# Altium PCB pcb.PcbDoc
Units mm, origin at the board's own origin, x right, y up, seen from the top; angles counter-clockwise.
Board outline 100 x 50 mm, 2 copper layers (Top Layer, Bottom Layer); 36 components, 19 nets, 91 pads, 8 vias.
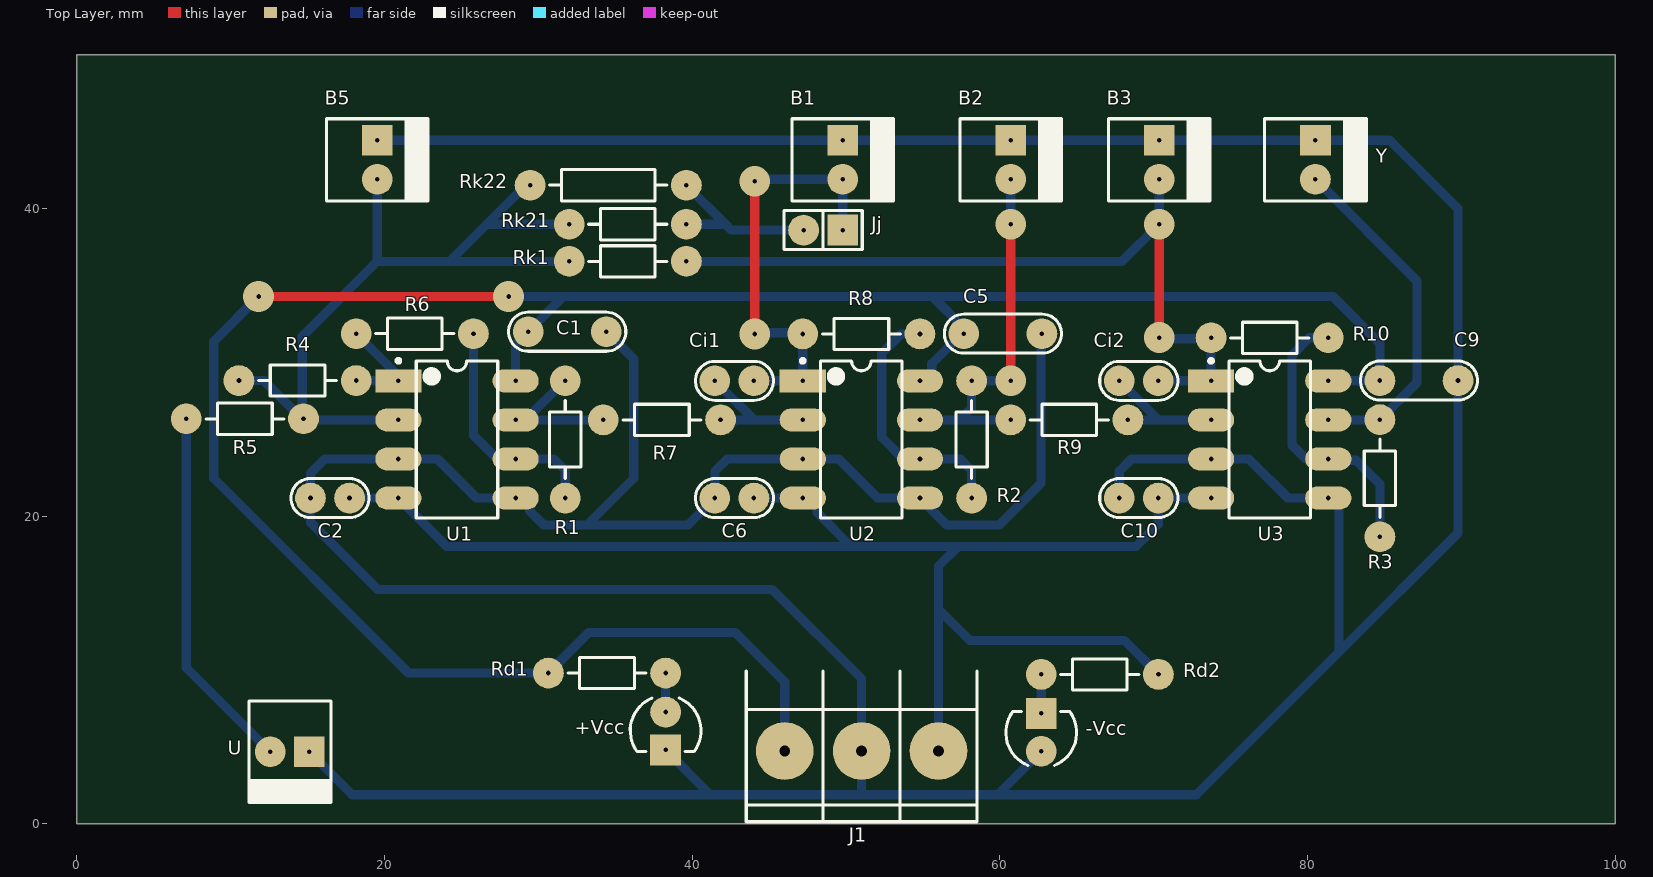
[diagram p0: Top Layer view]
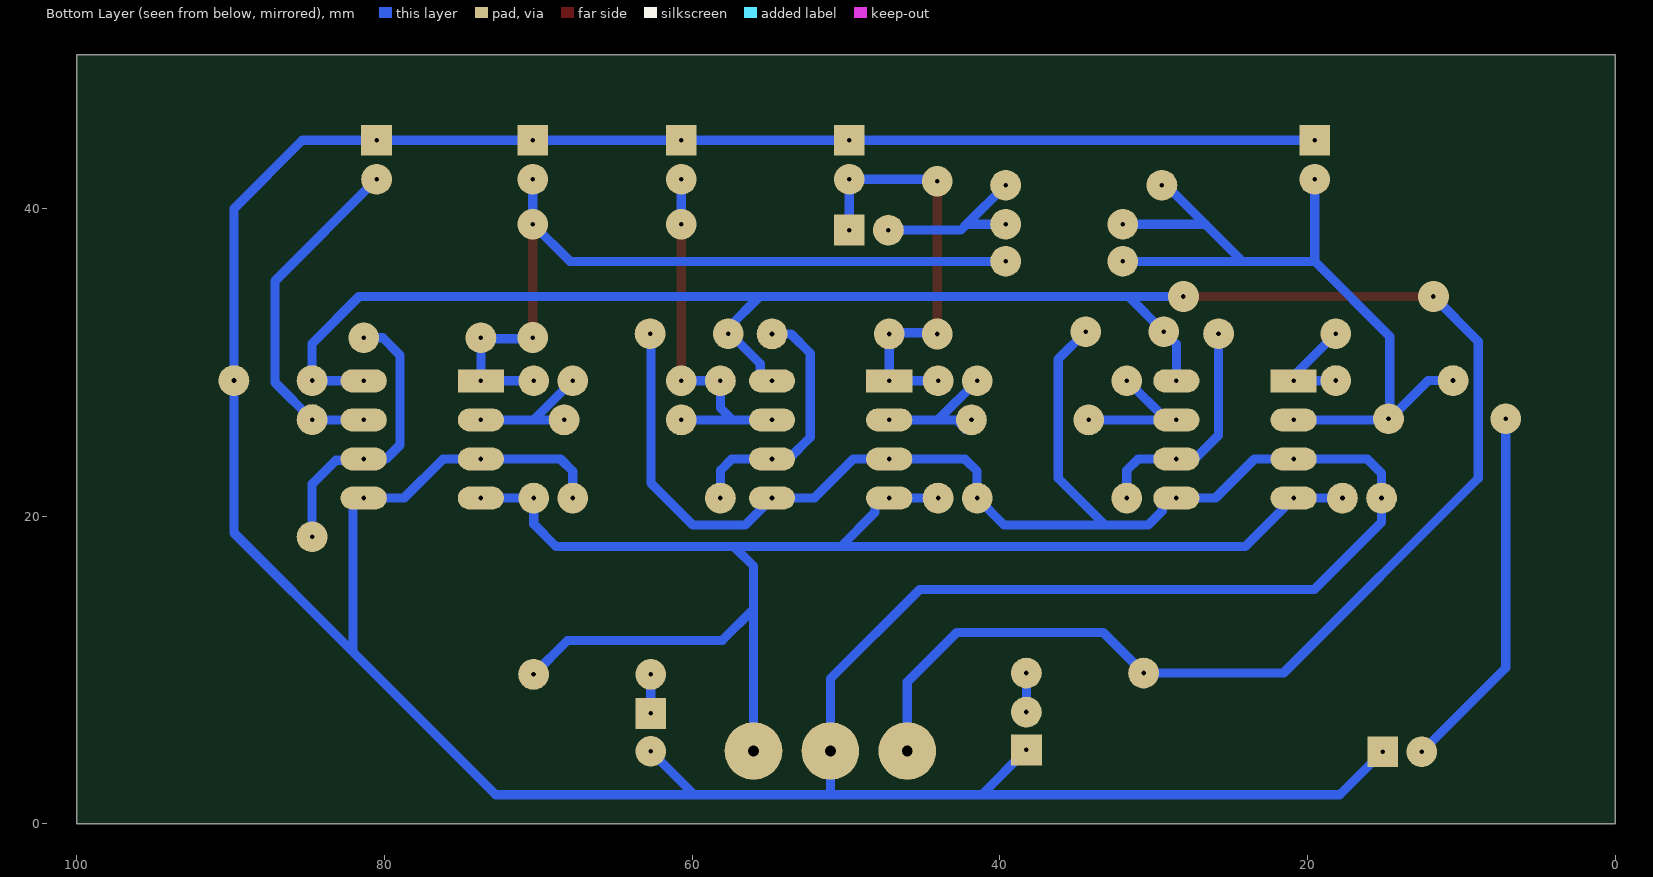
[diagram p1: Bottom Layer view, seen from below]
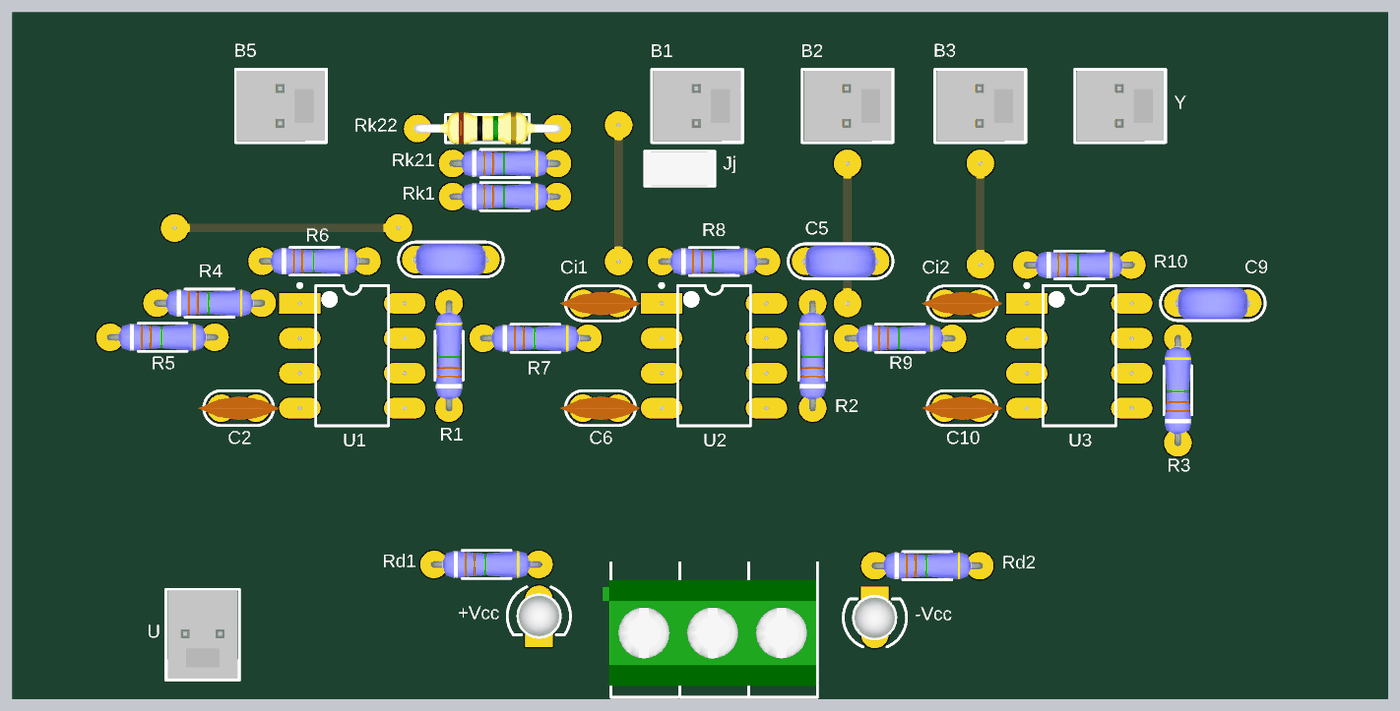
[diagram p2: 3D render of the assembled board from above, using the file's embedded part models]

## Layer stack, top to bottom
Top Solder: solder mask 0.0102, Solder Resist, Dk 3.5
Top Layer: signal copper 0.0356
Dielectric 1: dielectric 0.32, FR-4, Dk 4.8
Bottom Layer: signal copper 0.0356
Bottom Solder: solder mask 0.0102, Solder Resist, Dk 3.5

## Board outline
0,0 100,0 100,50 0,50

## Design rules (kind name [scope] priority, off if disabled: settings)
Clearance [All] p1: gap=0.3 ignorepadtopadclearanceinfootprint=FALSE
PolygonConnect [All] p1: connectstyle=Relief reliefconductorwidth=0.254 reliefentries=4 polygonreliefangle="90 Angle" airgapwidth=0.254
RoutingVias [All] p1: holewidth=0.3 width=2 viastyle="Through Hole" minholewidth=0.3 minwidth=1.5 maxholewidth=0.6 maxwidth=2
SolderMaskExpansion [All] p1: expansion=0.102 istentingtop=FALSE
Width [All] p1: maxlimit=0.9 minlimit=0.6 preferedwidth=0.6
30 further rules are at their usual default settings.

## Components (designator, comment, footprint, x,y, rotation, side; value= is the part's Value field where it differs from the comment)
+Vcc "LED" LED3 38.273,6.061 r270 top
-Vcc "LED" LED3 62.692,5.943 r90 top
B1 "MOLEX2" MOLEX2 49.784,44.45 r270 top
B2 "MOLEX2" MOLEX2 60.706,44.45 r270 top
B3 "MOLEX2" MOLEX2 70.358,44.45 r270 top
B5 "MOLEX2" MOLEX2 19.531,44.45 r270 top
C1 "100n" CAP200 31.877,32.004 r0 top
C2 "100n" CAP100 16.456,21.19 r180 top
C5 "100n" CAP200 60.198,31.877 r0 top
C6 "100n" CAP100 42.745,21.19 r180 top
C9 "100n" CAP200 87.249,28.829 r0 top
C10 "100n" CAP100 69.034,21.19 r180 top
Ci1 "1u" CAP100 42.745,28.81 r180 top
Ci2 "1u" CAP100 69.034,28.81 r180 top
J1 "BORNERA 3" BORNERA3 51.016,4.746 r90 top
Jj "JUMPER" JUMPER2 48.514,38.608 r180 top
R1 "10k" RES300 31.75,21.19 r90 top
R2 "10k" RES300 58.166,21.19 r90 top
R3 "10k" RES300 84.709,18.669 r90 top
R4 "10k" RES300 10.536,28.829 r0 top
R5 "10k" RES300 7.112,26.343 r0 top
R6 "10k" RES300 18.161,31.877 r0 top
R7 "100k" RES300 34.222,26.27 r0 top
R8 "10k" RES300 47.19,31.858 r0 top
R9 "47k" RES300 60.706,26.27 r0 top
R10 "10k" RES300 73.733,31.604 r0 top
Rd1 "560" RES300 30.653,9.816 r0 top
Rd2 "560" RES300 62.692,9.724 r0 top
Rk1 "10k" RES300 32.004,36.576 r0 top
Rk21 "10k/1.33" RES300 32.004,38.989 r0 top
Rk22 "15k" RES400 29.464,41.529 r0 top
U "MOLEX2" MOLEX2 15.113,4.699 r180 top
U1 "TL082CP" P0008A 24.711,25 r0 top
U2 "TL082CP" P0008A 51,25 r0 top
U3 "TL082CP" P0008A 77.543,25 r0 top
Y "MOLEX2" MOLEX2 80.518,44.45 r270 top

## Footprints (in the part's own frame and the unit in brackets; to place one, negate y for a bottom-side part, rotate by r counter-clockwise, add the part's x,y. Pads: shape width x height; smd on the part's side, far side on the other; paste and mask are expansions set on the pad)
BORNERA3 [mm] "Bornera con Tornillos 5mm separación"
  round 3.75 hole 0.7: 1(0,5) 2(0,0) 3(0,-5)
  silkscreen extent -4.6,-7.5 5.2,7.5, body extent -3.76,-7.39 3.94,8.11, height 10.05
CAP100 [mm]
  round 2 hole 0.3: 1(-1.27,0) 2(1.27,0)
  silkscreen extent -2.54,-1.27 2.54,1.27, body extent -2.92,-0.84 2.92,0.86, height 6.12
CAP200 [mm]
  round 2 hole 0.3: 1(-2.54,0) 2(2.54,0)
  silkscreen extent -3.81,-1.27 3.81,1.27, body extent -2.79,-1.17 2.79,1.12, height 6.24
JUMPER2 [mm]
  rect 2x2 hole 0.3: 1(-1.27,0)
  round 2 hole 0.3: 2(1.27,0)
  silkscreen extent -2.54,-1.27 2.54,1.27, body extent -2.46,-1.27 2.54,1.27, height 9.5
LED3 [mm]
  round 2 hole 0.3: 1(-1.219,0)
  rect 2x2 hole 0.3: 2(1.245,0)
  silkscreen extent -2.13,-2.3 1.36,2.3, body extent -1.65,-1.63 1.65,1.66, height 0.49
MOLEX2 [mm]
  rect 2x2 hole 0.3: 1(0,0)
  round 2 hole 0.3: 2(2.54,0)
  silkscreen extent -1.4,-3.3 3.94,3.3, body extent -1.27,-3.18 3.81,3.18, height 10.74
P0008A [mm] "DIP, 8-Leads, Body 10.15x6.6mm, Pitch 2.54mm"
  rect 3x1.5 hole 0.3: 1(-3.81,3.81)
  oval 3x1.5 hole 0.3: 2(-3.81,1.27) 3(-3.81,-1.27) 4(-3.81,-3.81) 5(3.81,-3.81) 6(3.81,-1.27) 7(3.81,1.27) 8(3.81,3.81)
  silkscreen extent -3.93,-5.1 2.65,5.23, body extent -3.95,-5.07 3.95,5.07, height 5.08
RES300 [mm]
  round 2 hole 0.3: 1(0,0) 2(7.62,0)
  silkscreen extent 1.27,-1.02 6.35,1.02, body extent -0.25,-0.97 7.87,0.97, height 2.01
RES400 [mm]
  round 2 hole 0.3: 1(0,0) 2(10.16,0)
  silkscreen extent 1.27,-1.02 8.89,1.02, body extent -0.3,-1.14 10.46,1.17, height 2.43

## Part data
C1 C2 C5 C6 C9 C10 Ci1 Ci2: library part CAP
R1 R2 R3 R4 R5 R6 R7 R8 R9 R10 Rd1 Rd2 Rk1 Rk21 Rk22: library part RES
U1 U2 U3: library part CMP-0055-00158-5, "JFET-Input Operational Amplifier, 7 to 36 V, 0 to 70 degC, 8-pin DIP (P8), Pb-Free (RoHS)", Manufacturer="Texas Instruments", Rating=Catalog, Total Supply Voltage(Max)(+5V is 5, +/-5V is 10)=36, Total Supply Voltage(Min)(+5V is 5, +/-5V is 10)=7, CMRR(Min)(dB)=70, Code_JEDEC=MS-001, ComponentLink1Description="Manufacturer URL", ComponentLink1URL=http://www.ti.com/, ComponentLink2Description=Datasheet, ComponentLink2URL=http://www.ti.com/lit/ds/symlink/tl082.pdf, ComponentLink3Description="Package Specification", ComponentLink3URL=http://www.ti.com/litv/pdf/mpdi001b, DatasheetVersion=SLOS081G, Eco-Plan="Pb-Free (RoHS)", GBW(Typ)(MHz)=3, IIB(Max)(pA)=400, Iq per channel(Max)(mA)=2.8, Mounting Technology="Through Hole", Number of Channels=2, Offset Drift(Typ)(uV/C)=18, PackageDescription="8-Pin Plastic In-Line, Body 9.59 x 6.35 mm, Pitch 2.54 mm", PackageReference=P0008A, PackageVersion="4040082/E, 04/2010", PartNumber=TL082CP, Slew Rate(Typ)(V/us)=13, Sub Family="General Purpose Amplifier, High Supply Voltage Amplifier (>=30V)", Vio (25C)(Max)(mV)=15, Vn at 1kHz(Typ)(nV/rtHz)=18

## Via types
v1: diameter 2, hole 0.3, Top Layer to Bottom Layer, 8 vias

## Nets (pads, with @x,y where several pads share a name; then routed paths per layer and width w, separated by ;. In a path a pad name is that pad's centre, name@x,y a point inside that pad or via, vN(x,y) a via of type N, cw(c..) or ccw(c..) an arc to the next point about the centre after c; other vN are vias at no path point)
+12V: C1.1 C5.1 C9.1 J1.1 Rd1.1 U1.8 U2.8 U3.8 | length 156.9
  Top Layer w0.6: v1(11.811,34.29) v1(28.067,34.29)
  Bottom Layer w0.6: v1(11.811,34.29) 8.89,31.369 8.89,22.479 21.553,9.816 Rd1.1 33.283,12.446 42.799,12.446 46.016,9.229 J1.1 J1.1@45.597,5.165 ; v1@28.194,34.29 31.623,34.29 ; U1.8 28.521,31.188 C1.1 ; C1.1@29.337,31.625 C1.1 ; U2.8 55.163,28.81 55.579,29.226 55.579,29.925 57.658,32.004 57.658,32.258 55.626,34.29 ; U3.8 81.362,28.82 84.065,28.82 C9.1@84.074,28.829 ; C9.1 84.709,31.242 81.661,34.29 55.626,34.29 ; C1.1 31.623,34.29 ; 31.623,34.29 55.626,34.29
-12V: C2.1 C6.1 C10.1 J1.3 Rd2.2 U1.4 U2.4 U3.4 | length 94.8
  Bottom Layer w0.6: C2.1@18.615,21.19 U1.4 24.057,18.034 50.346,18.034 ; C6.1@44.904,21.19 47.696,21.19 48.112,20.774 48.112,20.268 50.346,18.034 ; J1.3 56.016,13.961 ; 56.016,13.97 56.016,13.961 ; Rd2.2 68.098,11.938 58.039,11.938 56.016,13.961 ; U3.4@72.844,21.19 C10.1 70.304,19.504 68.834,18.034 57.277,18.034 ; 50.346,18.034 57.277,18.034 ; 56.016,13.961 56.007,13.97 56.007,16.764 57.277,18.034
B1: B1.2 Ci1.1 Jj.1 R8.1 U2.1 | length 26.6
  Top Layer w0.6: v1(44.069,31.858) v1(44.069,41.783)
  Bottom Layer w0.6: v1@44.069,32.004 v1@44.142,31.931 ; v1(44.069,41.783) 44.196,41.91 B1.2 Jj.1 ; Ci1.1@44.904,28.81 U2.1 R8.1 47.117,31.931 v1@45.031,31.931
B2: B2.2 R2.2 R9.1 U2.7 | length 24.1
  Top Layer w0.6: v1@60.706,29.337 v1(60.706,38.989)
  Bottom Layer w0.6: U2.7 57.385,26.27 ; v1@60.579,39.116 v1(60.706,38.989) B2.2 ; R9.1 57.385,26.27 ; v1(60.706,28.81) R2.2 58.166,27.051 57.385,26.27
B3: B3.2 Ci2.1 R10.1 Rk1.2 U3.1 | length 49.9
  Top Layer w0.6: v1(70.358,31.623) v1(70.358,38.989)
  Bottom Layer w0.6: Rk1.2 67.945,36.576 v1(70.358,38.989) B3.2 ; Ci2.1 U3.1@72.844,28.81 ; v1(70.358,31.623) 70.431,31.55 R10.1@72.79,31.55 ; R10.1@73.679,31.55 R10.1 U3.1
B4: R3.2 U3.7 Y.2 | length 22.2
  Bottom Layer w0.6: Y.2 87.122,35.306 87.122,28.702 R3.2 ; U3.7 R3.2@84.182,26.27
B5: B5.2 R4.1 R5.2 Rk1.1 Rk21.1 Rk22.1 U1.2 | length 53.2
  Bottom Layer w0.6: R4.1 12.156,28.829 14.65,26.334 14.65,31.695 19.531,36.576 ; R5.2@14.815,26.27 U1.2 ; B5.2 19.531,36.576 ; 24.434,36.78 26.643,38.989 ; Rk22.1@29.056,41.402 26.643,38.989 ; Rk1.1 24.434,36.576 19.531,36.576 ; Rk21.1 26.643,38.989
GND: +Vcc.2 -Vcc.1 B1.1 B2.1 B3.1 B5.1 C1.2 C2.2 C5.2 C6.2 C9.2 C10.2 J1.2 U1.3 U1.5 U2.3 U2.5 U3.3 U3.5 U.1 Y.1 | length 342.2
  Bottom Layer w0.6: U.1 17.907,1.905 41.184,1.905 ; B5.1 B1.1 60.198,44.45 B3.1 Y.1 85.344,44.45 89.789,40.005 C9.2 89.789,18.923 82.042,11.176 ; C1.2 36.195,30.226 36.195,22.479 33.147,19.431 ; +Vcc.2 41.184,1.905 ; C5.2@62.684,32.004 62.684,22.171 59.944,19.431 56.569,19.431 U2.5 52.07,21.19 49.53,23.73 U2.3 42.272,23.73 41.475,22.933 C6.2 39.716,19.431 33.147,19.431 ; -Vcc.1 59.873,1.905 ; C10.2 67.764,22.933 68.561,23.73 U3.3 76.193,23.73 78.733,21.19 U3.5 81.626,21.19 82.042,20.774 82.042,11.176 ; 33.147,19.431 30.364,19.431 29.443,20.352 29.443,20.774 29.027,21.19 U1.5 25.981,21.19 23.441,23.73 U1.3 16.11,23.73 15.186,22.806 C2.2 15.186,19.612 19.558,15.24 45.212,15.24 51.016,9.436 J1.2 51.016,1.943 51.054,1.905 ; 41.184,1.905 51.054,1.905 ; 51.054,1.905 59.873,1.905 ; 59.873,1.905 72.771,1.905 82.042,11.176
Net+Vcc_1: +Vcc.1 Rd1.2 | length 2.5
  Bottom Layer w0.6: +Vcc.1 Rd1.2
Net-Vcc_2: -Vcc.2 Rd2.1 | length 2.5
  Bottom Layer w0.6: -Vcc.2 Rd2.1
NetCi1_2: Ci1.2 R7.2 U2.2 | length 9.2
  Bottom Layer w0.6: Ci1.2 44.015,26.27 ; R7.2@41.842,25.654 42.221,25.654 42.837,26.27 44.015,26.27 ; U2.2 44.015,26.27
NetCi2_2: Ci2.2 R9.2 U3.2 | length 8.2
  Bottom Layer w0.6: Ci2.2 70.304,26.27 ; R9.2@68.199,26.27 70.304,26.27 ; U3.2@72.844,26.27 70.304,26.27
NetJj_2: Jj.2 Rk21.2 Rk22.2 | length 11.4
  Bottom Layer w0.6: Rk21.2 42.164,38.989 ; Rk22.2 42.164,38.989 ; Jj.2 42.545,38.608 42.164,38.989
NetR1_1: R1.1 R6.2 U1.6 | length 15.3
  Bottom Layer w0.6: R6.2 25.781,25.273 27.324,23.73 U1.6 31.007,23.73 31.75,22.987 R1.1
NetR1_2: R1.2 R7.1 U1.7 | length 9.5
  Bottom Layer w0.6: U1.7 R7.1 ; U1.7@29.168,26.27 31.75,28.853 R1.2@31.75,28.956
NetR2_1: R2.1 R8.2 U2.6 | length 16.7
  Bottom Layer w0.6: R8.2 53.575,31.858 52.324,30.607 52.324,25.146 53.708,23.762 54.778,23.762 U2.6 57.423,23.73 58.15,23.003 58.15,21.547 R2.1@58.166,21.531
NetR3_1: R3.1 R10.2 U3.6 | length 18.9
  Bottom Layer w0.6: R10.2 80.118,31.604 78.994,30.48 78.994,24.638 79.902,23.73 U3.6 81.433,23.65 83.157,23.65 84.709,22.098 R3.1
NetR4_2: R4.2 R6.1 U1.1 | length 6.5
  Bottom Layer w0.6: R6.1 20.901,29.137 U1.1 R4.2@18.615,28.81
NetR5_1: R5.1 U.2 | length 23.9
  Bottom Layer w0.6: R5.1 7.112,10.16 U.2